# EAGLE board INA219-SOT23 (EAGLE 8.1.1)
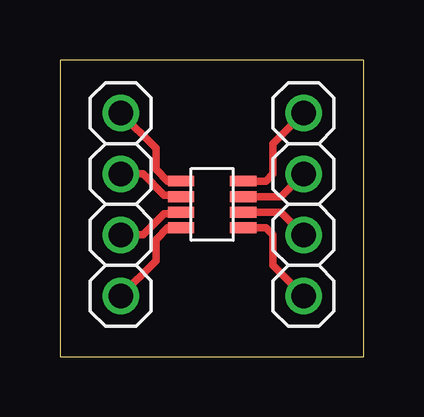
[diagram p0: board, top side]

Size 12.68 x 12.37 mm. Coordinates in mm from the lower left corner, seen from the top.
Outline: 0,0 12.68,0 12.68,12.37 0,12.37 0,0
Copper layers (1*16): Top 0.035mm / dielectric 1.5mm / Bottom 0.035mm
Design rules "default": minimum track width 10mil, minimum drill 24mil, track to track 8mil, track to pad 8mil, pad to pad 8mil, via to via 8mil, smd to smd 8mil, copper to edge 40mil, drill to drill 8mil, minimum pad ring 10mil, minimum via ring 8mil, stop-mask expansion 4mil, vias tented up to drill 0mil, thermal gap 10mil

## Footprints (pad centres in the part's own frame; a part is rotated, then mirrored left to right if it is on the bottom)
1X04 = drill 1.016: 1 -3.81,0; 2 -1.27,0; 3 1.27,0; 4 3.81,0
SOT-23-8 = smd 0.45 x 1.1: P$1 -0.975,-1.3; P$2 -0.325,-1.3; P$3 0.325,-1.3; P$4 0.975,-1.3; P$5 0.975,1.3; P$6 0.325,1.3; P$7 -0.325,1.3; P$8 -0.975,1.3

## Placement (x,y rotation side)
JP1  [1X04]  10.16,6.35 270 top
JP2  [1X04]  2.54,6.35 270 top
U$1  INA219SOT23  [SOT-23-8]  6.35,6.35 90 top

## Library data of the parts
JP1 JP2 = pinhead
U$1 = texas

## Nets
N$1: JP1.4 U$1.P$1
N$2: JP1.3 U$1.P$2
N$3: JP1.2 U$1.P$3
N$4: JP1.1 U$1.P$4
N$5: JP2.1 U$1.P$5
N$6: JP2.2 U$1.P$6
N$7: JP2.3 U$1.P$7
N$8: JP2.4 U$1.P$8

## Tracks (layer width: path | path; a pad name or v marks a point on that pad's centre or on a via)
N$1
  Top 0.305: U$1.P$1 8.6,5.38 8.89,5.08 8.89,3.81 JP1.4
N$2
  Top 0.305: JP1.3 9.21,6.03 U$1.P$2
N$3
  Top 0.305: JP1.2 9.21,6.67 U$1.P$3
N$4
  Top 0.305: U$1.P$4 8.6,7.33 8.89,7.62 8.89,8.89 JP1.1
N$5
  Top 0.305: U$1.P$5 4.49,7.33 4,7.81 4,8.7 JP2.1
N$6
  Top 0.305: U$1.P$6 4.98,6.74 4.35,6.74 3.48,7.62 JP2.2
N$7
  Top 0.305: U$1.P$7 4.98,5.96 4.35,5.96 3.48,5.08 JP2.3
N$8
  Top 0.305: U$1.P$8 4.49,5.38 4,4.89 4,4 JP2.4